# EAGLE board 9vRelay (EAGLE 7.4.0)
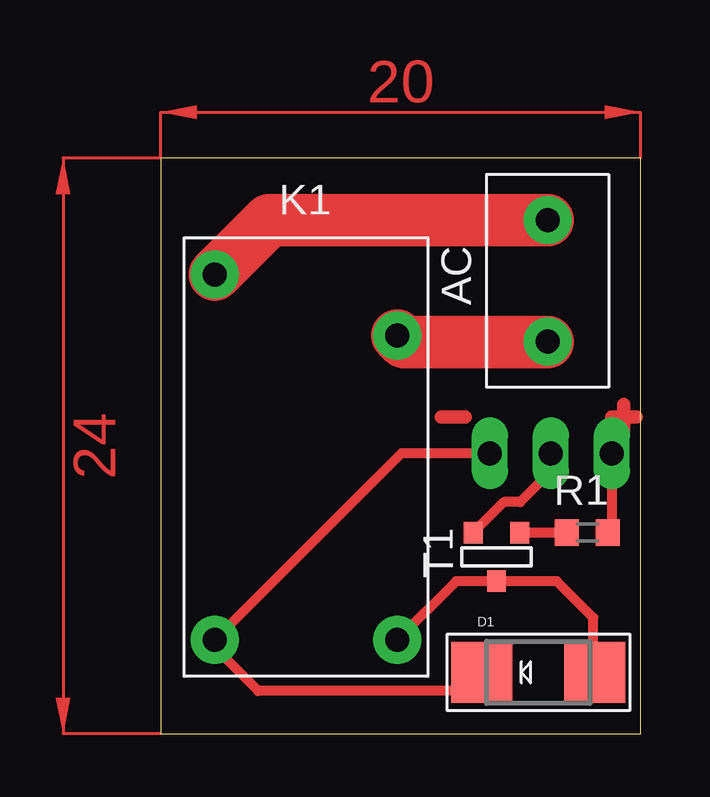
[diagram p0: board, top side]
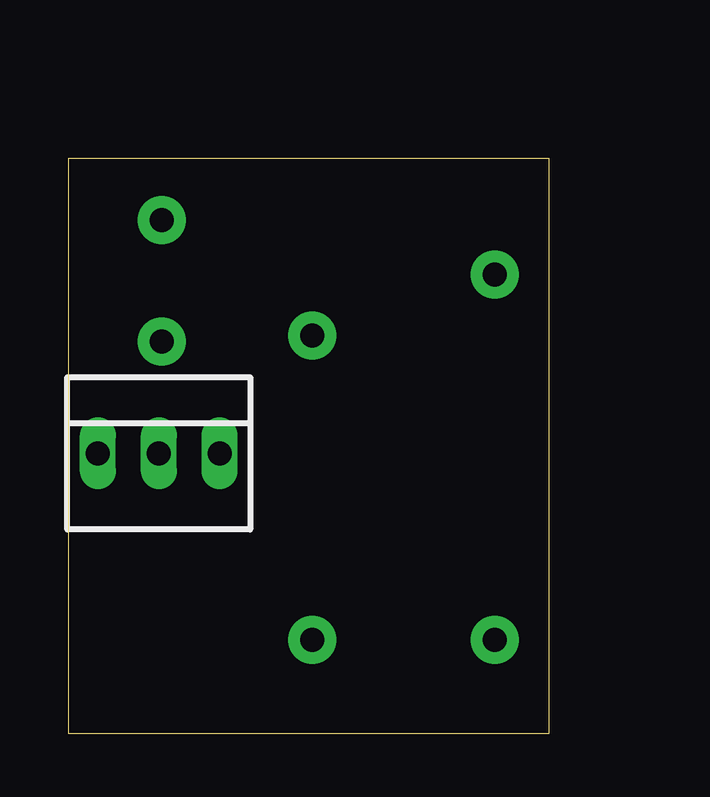
[diagram p1: board, bottom side, seen from below]

Size 20 x 24 mm. Coordinates in mm from the lower left corner, seen from the top.
Outline: 0,0 20,0 20,24 0,24 0,0
Copper layers (1*16): Top 0.035mm / dielectric 1.5mm / Bottom 0.035mm
Design rules "default": minimum track width 10mil, minimum drill 24mil, track to track 8mil, track to pad 8mil, pad to pad 8mil, via to via 8mil, smd to smd 8mil, copper to edge 40mil, drill to drill 8mil, minimum pad ring 10mil, minimum via ring 8mil, stop-mask expansion 4mil, vias tented up to drill 0mil, thermal gap 10mil

## Footprints (pad centres in the part's own frame; a part is rotated, then mirrored left to right if it is on the bottom)
TBLOCK1X2 = drill 1 pad 2: 1 -2.54,0; 2 2.54,0
SMADIODE = smd 2.54 x 2.54: A 2.349,0; C -2.349,0
OJE-SS-109LMH = drill 1 pad 2: 1 -7.62,3.81; 2 -7.62,-3.81; 3 5.08,-3.81; 4 7.62,3.81
R0603 = smd 1 x 1.1: 1 -0.85,0; 2 0.85,0
SOT-23 = smd 0.787 x 0.889: 1 0.025,-1.016; 2 -0.94,1.016; 3 0.991,1.016
22-23-2031 = drill 1 long: 1 -2.54,0; 2 0,0; 3 2.54,0

## Placement (x,y rotation side)
AC  TBLOCK1X2  [TBLOCK1X2]  16.13,18.88 90 top
D1  [SMADIODE]  15.73,2.56 0 top
K1  OJE-SS-109LMH  [OJE-SS-109LMH]  6.06,11.53 90 top
R1  [R0603]  17.78,8.38 180 top
T1  2N3904  [SOT-23]  13.97,7.37 0 top
X1  22-23-2031  [22-23-2031]  16.26,11.68 0 bottom

## Library data of the parts
AC K1 = userdefined
D1 = adafruit
R1 = resistor
T1 = zetex; OC_FARNELL: unknown; OC_NEWARK: unknown
X1 = con-molex; MF: MOLEX; MPN: 22-23-2031; OC_FARNELL: 1462950; OC_NEWARK: 30C0862

## Nets
N$1: D1.A K1.2 T1.1
N$2: D1.C K1.1 X1.3
N$3: R1.1 X1.1
N$4: AC.2 K1.4
N$7: T1.2 X1.2
N$8: R1.2 T1.3
N$11: AC.1 K1.3

## Tracks (layer width: path | path; a pad name or v marks a point on that pad's centre or on a via)
N$1
  Top 0.406: D1.A 18.03,2.6 18.03,4.83 16.51,6.35 T1.1 12.31,6.35 K1.2
N$2
  Top 0.406: D1.C 12.6,1.78 4.06,1.78 2.25,3.59 K1.1 10.03,11.68 X1.3
N$3
  Top 0.406: X1.1 18.8,8.55 R1.1
N$4
  Top 2.184: K1.4 4.52,21.42 AC.2
N$5
  Top 0.559: 19.3,13.72 19.3,12.7
N$7
  Top 0.406: X1.2 16.26,10.92 14.99,9.65 14.3,9.65 T1.2
N$8
  Top 0.406: T1.3 R1.2
N$9
  Top 0.559: 18.8,13.21 19.81,13.21
N$10
  Top 0.559: 11.68,13.21 12.7,13.21
N$11
  Top 2.184: K1.3 10.14,16.34 AC.1
(copper drawn outside any net)
  shapes: Top area x2